# Altium PCB LOAD CONTROL_Final2.PcbDoc (part 2 of 2)
Units mm, origin at the board's own origin, x right, y up, seen from the top; angles counter-clockwise.
Board outline 51.64 x 106.92 mm, 2 copper layers (Top Layer, Bottom Layer); 84 components, 58 nets, 283 pads, 102 vias.
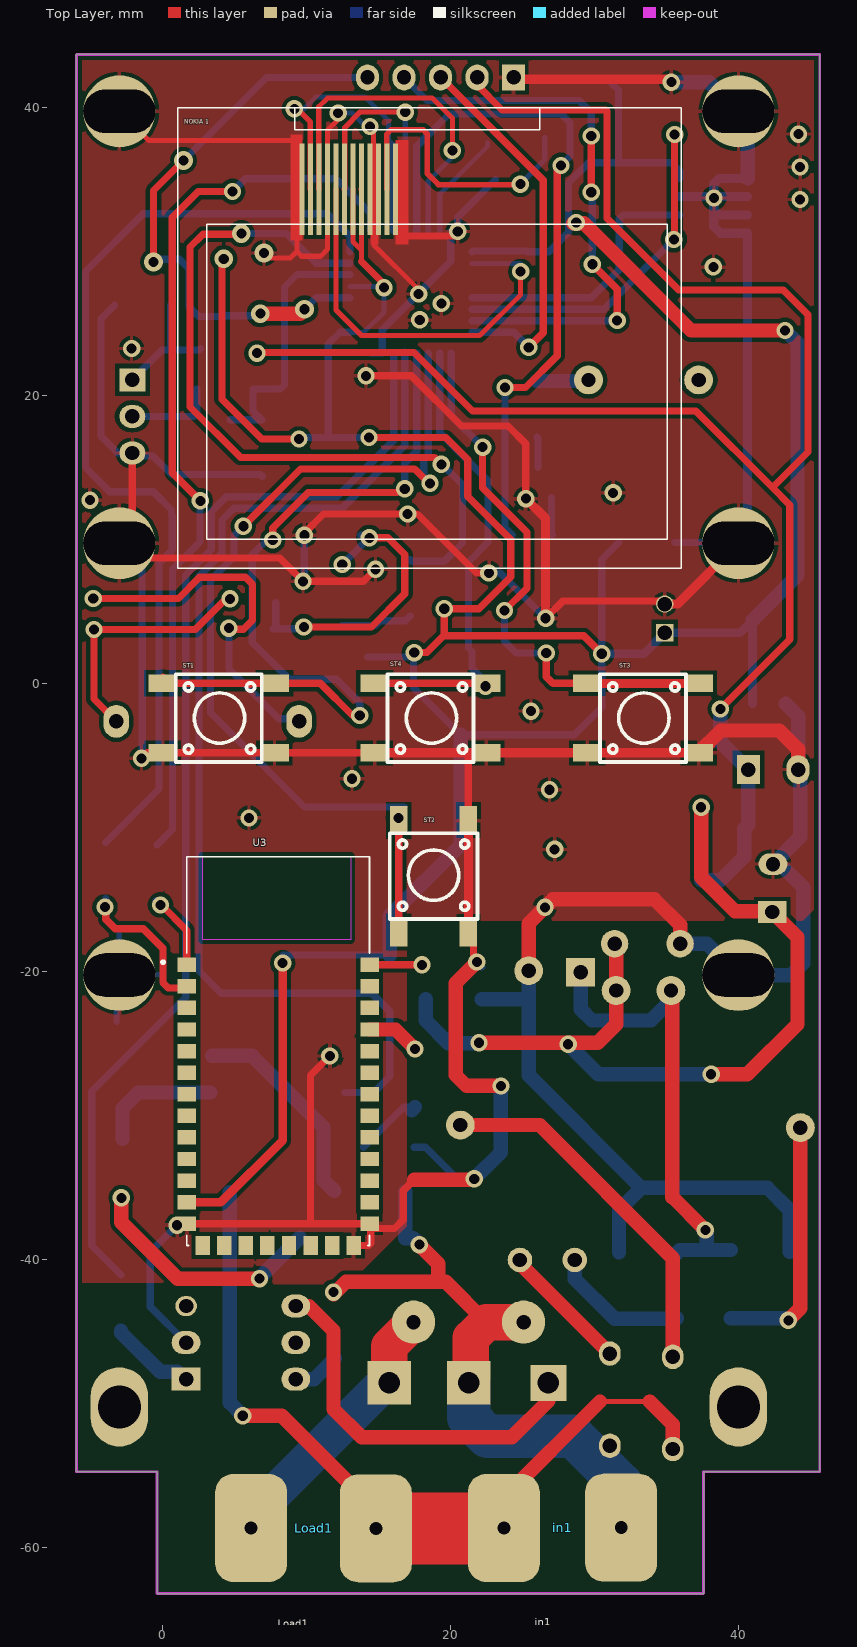
[diagram p0: Top Layer view]

## Polygon pours and split planes (outlines as drawn) (continued)
GND on Top Layer "Top Layer-No Net" (solid, pour order 38): 45.644,43.688 -5.969,43.688 -6.02,43.637 -6.02,-10.414 45.593,-10.414 45.618,-10.389
GND on Bottom Layer "Top Layer-No Net" (solid, pour order 50): 45.39,43.485 -5.588,43.485 -5.817,43.256 -5.69,43.129 -5.69,-24.663 14.884,-24.663 16.637,-22.911 16.637,-17.602 42.316,-17.602 45.39,-14.529

## Keep-outs
Keep-Out Layer:
  lines w0.2: 37.592,-63.231 -0.358,-63.231 -0.358,-54.77 -5.969,-54.77 -5.969,43.688 1.045,43.688 38.86,43.688 45.666,43.688 45.666,-54.77 37.592,-54.77 37.592,-63.231 ; 37.592,-63.231 37.592,-63.231

## Other copper
Top Layer:
  rectangle net GND: 8.903,30.769 9.728,38.128
  rectangle net GND: 16.185,30.492 17.087,37.754
  rectangle net GND: 14.472,30.492 15.011,37.309

## Silkscreen, mask and mechanical layers (free items; w line width, h text height)
Bottom Overlay:
  drawing of 38 lines, arcs and shapes, not listed
  text "Serial : AR-L0202" at 34.577,41.642 h0.5
  text "+" at -0.062,37.084 h0.5 r270
  text "Don't Touch" at 21.983,-17.661 h1

## Text inside footprints (layer, text, board x,y; h text height)
Buzzer1: Bottom Overlay "+" at 37.404,22.073 h0.5